# EAGLE board sonda0 (EAGLE 4.16)
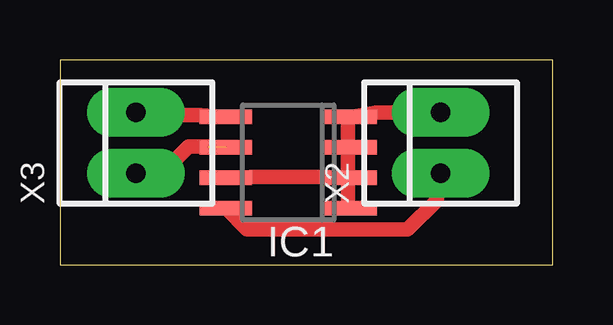
[diagram p0: board, top side]

Size 20.55 x 8.56 mm. Coordinates in mm from the lower left corner, seen from the top.
Outline: 0,0 20.55,0 20.55,8.56 0,8.56 0,0
Copper layers (1*16): Top 0.035mm / dielectric 1.5mm / Bottom 0.035mm
Design rules "mio2": minimum track width 24mil, minimum drill 24mil, track to track 24mil, track to pad 24mil, pad to pad 24mil, via to via 24mil, smd to smd 24mil, copper to edge 40mil, drill to drill 8mil, minimum pad ring 24mil, minimum via ring 24mil, stop-mask expansion 4mil, vias tented up to drill 0mil, thermal gap 10mil

## Footprints (pad centres in the part's own frame; a part is rotated, then mirrored left to right if it is on the bottom)
SO-08 = smd 0.6 x 2.2: 1 -1.905,-2.6; 2 -0.635,-2.6; 3 0.635,-2.6; 4 1.905,-2.6; 5 1.905,2.6; 6 0.635,2.6; 7 -0.635,2.6; 8 -1.905,2.6
22-23-2021 = drill 0.813 long: 1 -1.27,0; 2 1.27,0

## Placement (x,y rotation side)
IC1  24LC16BSN  [SO-08]  9.52,4.28 90 top
U$1  [A4P-LOC]  -9.68,-9.54 0 top  (outside the outline)
X2  22-23-2021  [22-23-2021]  15.87,5.09 90 top
X3  22-23-2021  [22-23-2021]  3.17,5.09 90 top

## Library data of the parts
IC1 = microchip
U$1 = frames
X2 X3 = con-molex

## Nets
GND: IC1.1 IC1.2 IC1.3 IC1.4 IC1.7 X2.2
N$1: IC1.6 X3.1
N$2: IC1.5 X3.2
VCC: IC1.8 X2.1

## Tracks (layer width: path | path; a pad name or v marks a point on that pad's centre or on a via)
GND
  Top 0.61: 12.01,4.89 12.01,6.11 IC1.4 13.18,6.36 X2.2 | IC1.7 7.94,3.67 11.2,3.67 IC1.2 12.01,3.67 | 12.01,3.67 12.01,2.45 IC1.1 | 12.01,3.67 12.01,4.89 | 12.01,4.89 IC1.3
N$1  (1 unrouted)
  Top 0.61: X3.1 4.24,3.82 5.35,4.94 6.17,4.94 6.37,4.94
N$2
  Top 0.61: IC1.5 5.86,6.26 5.15,6.26 X3.2
VCC
  Top 0.61: IC1.8 7.81,1.49 14.5,1.49 15.72,2.71 15.72,3.92 15.77,3.92 X2.1